# Altium PCB PCB1.PcbDoc
Units mil, origin at the board's own origin, x right, y up, seen from the top; angles counter-clockwise.
Board outline 1025.03 x 1080.03 mil, 2 copper layers (Top Layer, Bottom Layer); 7 components, 6 nets, 20 pads, 0 vias.
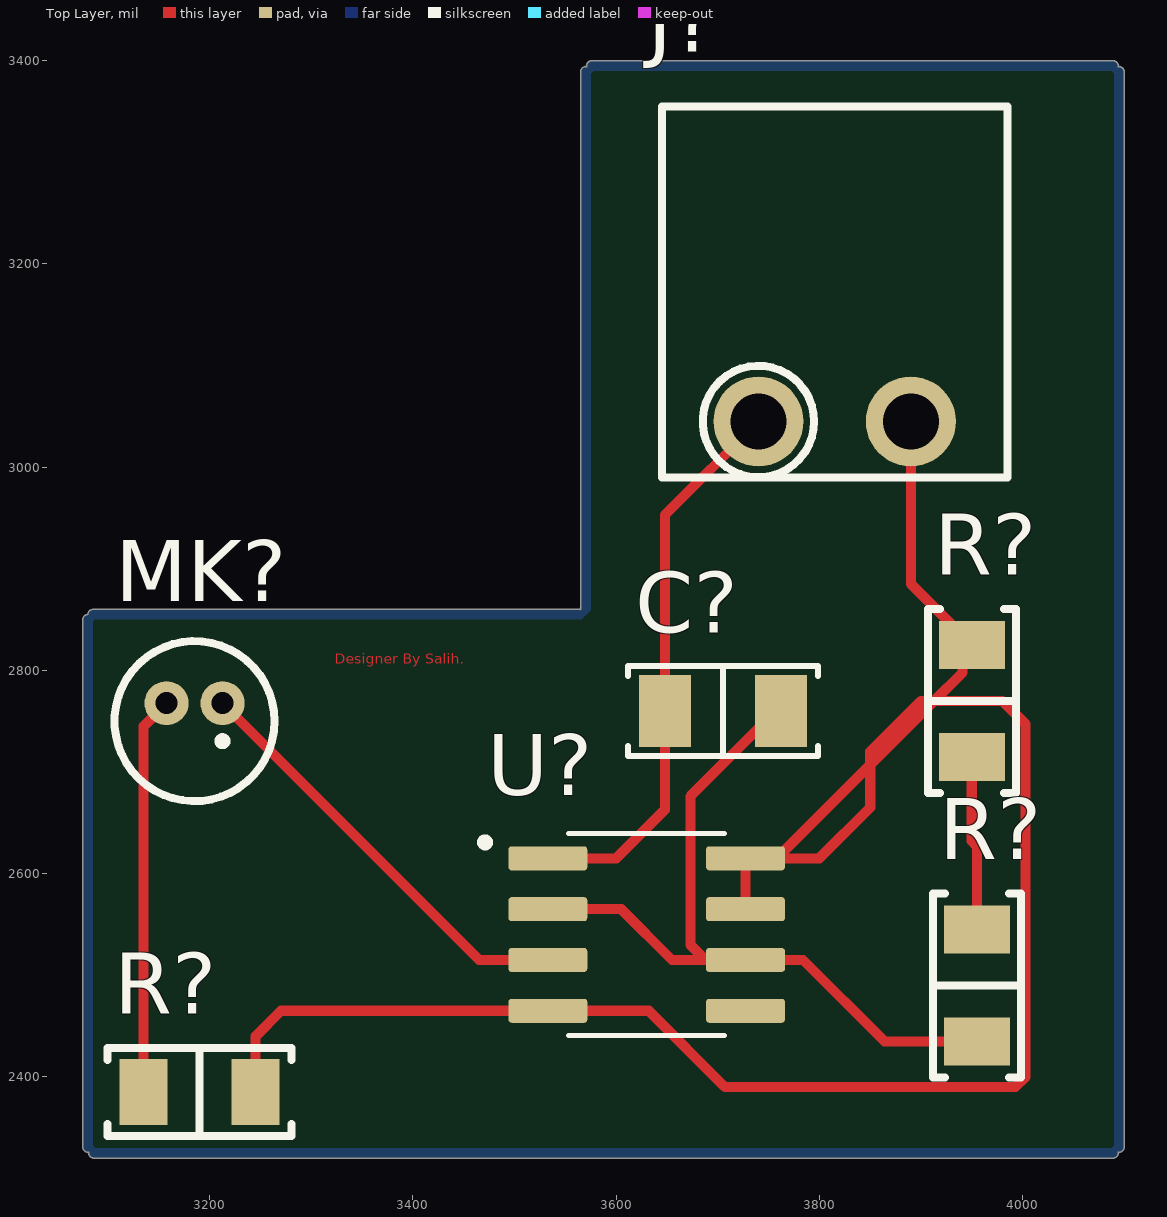
[diagram p0: Top Layer view]
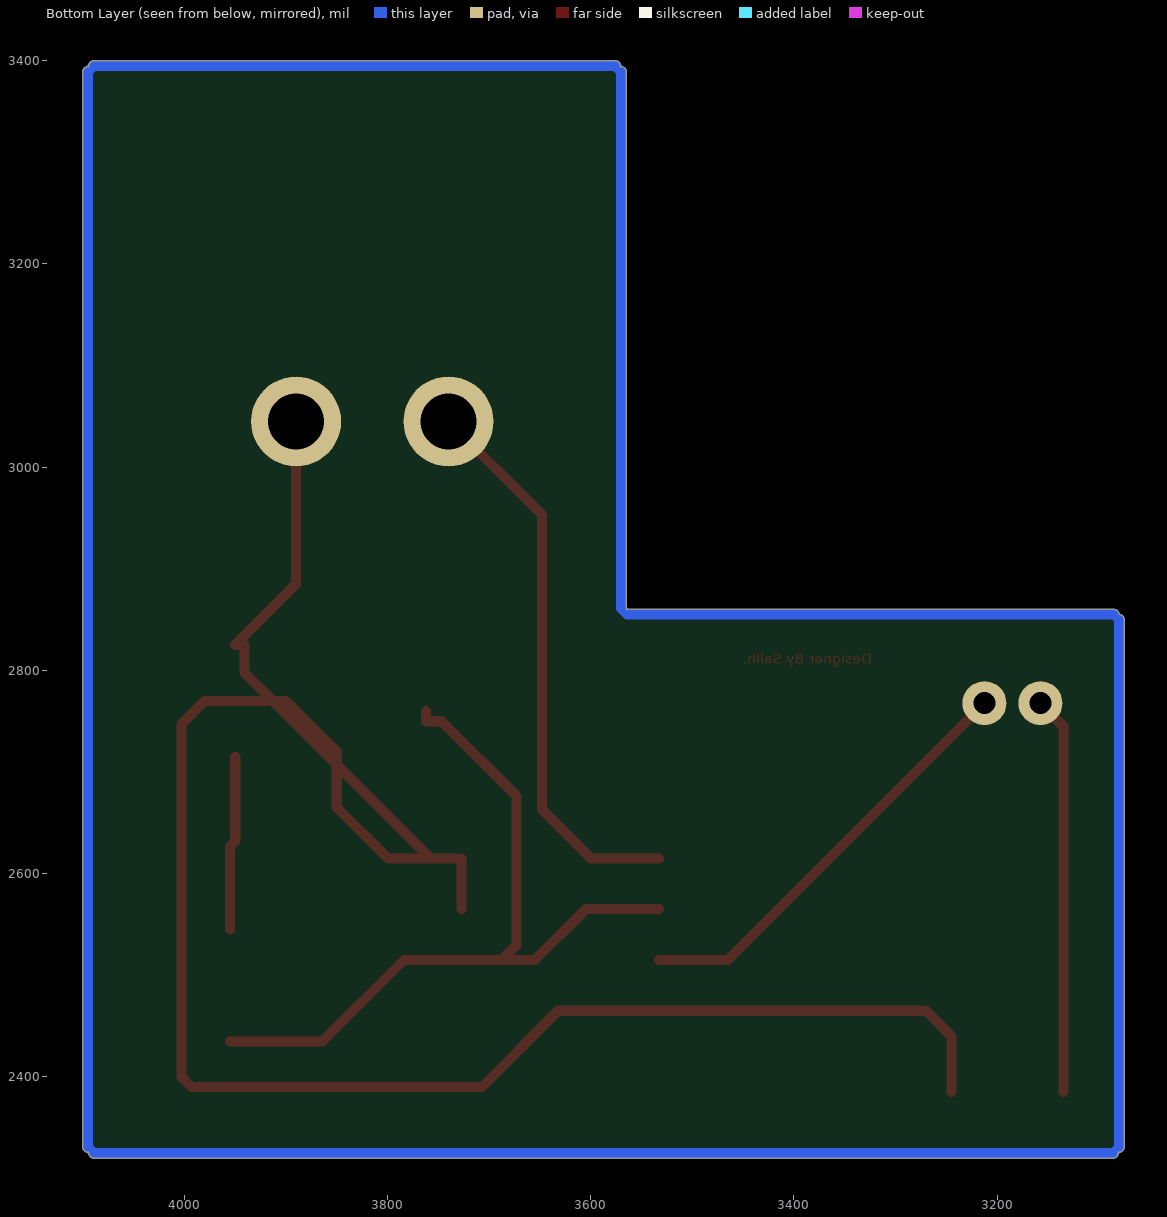
[diagram p1: Bottom Layer view, seen from below]
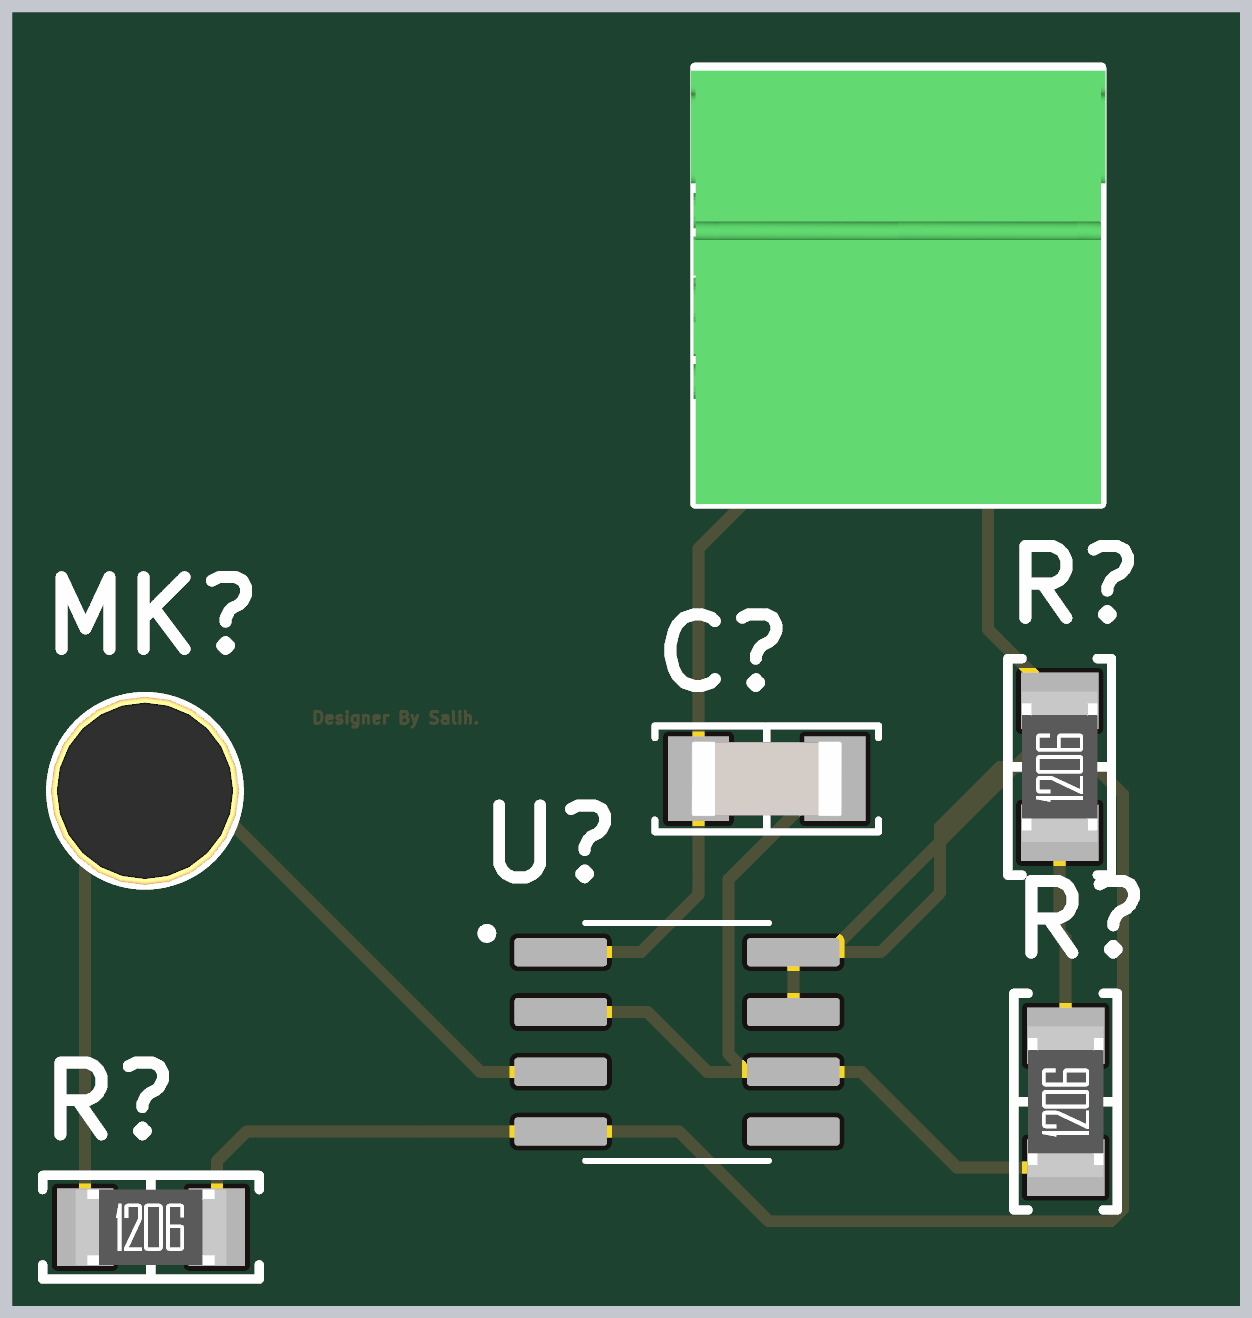
[diagram p2: 3D render of the assembled board from above, using the file's embedded part models]

## Layer stack, top to bottom
Top Solder: solder mask 0.4, Solder Resist, Dk 3.5
Top Layer: signal copper 1.4
Dielectric 1: dielectric 12.6, FR-4, Dk 4.8
Bottom Layer: signal copper 1.4
Bottom Solder: solder mask 0.4, Solder Resist, Dk 3.5

## Board outline
3074.99,2330.86 3074.99,2850 cw(c3080,2850) 3079.99,2855.01 cw(c3085,2855) 3085,2860.01 3564.14,2860.01 cw(c3564.14,2855) 3565.07,2859.93 cw(c3570,2860.86) 3564.99,2860.86 3564.99,3389.14 cw(c3570,3389.14) 3570.93,3394.07 cw(c3575.86,3395) 3575.86,3400.01 4089.14,3400.01 cw(c4089.14,3395) 4094.16,3395 cw(c4089.14,3395) 4094.07,3394.07 cw(c4095,3389.14) 4100.02,3389.14 4100.02,2330.86 cw(c4095,2330.86) 4094.07,2325.93 cw(c4089.14,2325) 4094.16,2325 cw(c4089.14,2325) 4089.14,2319.99 3085.86,2319.99 cw(c3085.86,2325) 3080.93,2325.93 cw(c3080,2330.86)

## Design rules (kind name [scope] priority, off if disabled: settings)
Clearance [All] p1: gap=10 ignorepadtopadclearanceinfootprint=FALSE except(0: Arc-Hole Track-Hole SMDPad-Hole THPad-Hole Via-Hole Fill-Hole Poly-Hole Region-Hole Text-Hole)
PolygonConnect [All] p1: connectstyle=Relief reliefconductorwidth=10 reliefentries=4 polygonreliefangle="90 Angle" airgapwidth=10
RoutingVias [All] p1: holewidth=28 width=50 viastyle="Through Hole" minholewidth=28 minwidth=50 maxholewidth=28 maxwidth=50
SolderMaskExpansion [All] p1: expansion=4 istentingtop=FALSE
Width [All] p1: maxlimit=10 minlimit=10 preferedwidth=10
30 further rules are at their usual default settings.

## Classes and differential pairs
component class Sheet1: C? J? MK? R? U?

## Components (designator, comment, footprint, x,y, rotation, side; value= is the part's Value field where it differs from the comment)
C? "47pF" "CAP 1206_3216 - 0.8MM" 3705,2760 r0 top
J? "OQ0232510000G" "FCI 06-381-2PIN" 3815,3175 r0 top
MK? "CMEJ-0415-42-P" "CUI CMEJ-0415-42-P" 3185,2750 r180 top
R? "22 kOhms" "RES 1206_3216" 3955,2490 r90 top
R? "2 kOhms" "RES 1206_3216" 3950,2770 r90 top
R? "33 Ohms" "RES 1206_3216" 3190,2385 r0 top
U? "LM555CM/NOPB" SOIC127P599X175-8N 3630,2540 r0 top

## Footprints (in the part's own frame and the unit in brackets; to place one, negate y for a bottom-side part, rotate by r counter-clockwise, add the part's x,y. Pads: shape width x height; smd on the part's side, far side on the other; paste and mask are expansions set on the pad)
"CAP 1206_3216 - 0.8MM" [mm] "Chip Capacitor, 2-Leads, Body 3.25x1.60mm, IPC Medium Density"
  rect 1.3x1.8 smd: 1(-1.45,0) 2(1.45,0)
  silkscreen extent -2.38,-1.13 2.38,1.13, body extent -1.6,-0.8 1.6,0.8, height 0.8
"CUI CMEJ-0415-42-P" [mm] "MIC COND ANALOG OMNI -42DB 4MM D"
  round 1.1 hole 0.55 mask+0.102: G(0.7,-0.45) OUT(-0.7,-0.45)
  silkscreen extent -2,-2 2,2, body extent -2,-2 2,2, height 1.83
"FCI 06-381-2PIN" [mm] "FCI Pluggable Terminal Block"
  round 2.25 hole 1.4: 1(-1.905,-3.302) 2(1.905,-3.302)
  silkscreen extent -4.32,-4.7 4.32,4.57, body extent -4.4,-4.7 4.4,4.5, height 7.6
"RES 1206_3216" [mm] "Chip Resistor, 2-Leads, Body 3.13x1.55mm, IPC Medium Density"
  rect 1.2x1.65 smd: 1(-1.4,0) 2(1.4,0)
  silkscreen extent -2.3,-1.1 2.3,1.1, body extent -1.6,-0.8 1.6,0.8, height 0.6
SOIC127P599X175-8N [mm]
  rrect25% 1.97x0.6 smd: 1(-2.47,1.905) 2(-2.47,0.635) 3(-2.47,-0.635) 4(-2.47,-1.905) 5(2.47,-1.905) 6(2.47,-0.635) 7/7(2.47,0.635) 8(2.47,1.905)
  silkscreen extent -4.14,-2.53 1.95,2.53

## Part data
C?: library part AC1206JRNPOBBN470, "CAP CER 47PF 500V NPO 1206", Device Package="1206 (3216 Metric)", Manufacturer=Yageo, Operating Temperature="-55°C ~ 125°C", Ratings=AEC-Q200, Supplier Part Number 1=311-3213-1-ND, Temperature Coefficient="C0G, NP0", Tolerance=±5%, Voltage - Rated=500V, Applications=Automotive, Capacitance=47pF, ComponentLink1Description=Datasheet, ComponentLink1URL=http://www.yageo.com/NewPortal/_en/search/productDocs.jsp?YageoPartNumber=AC1206JRNPOBBN470, ComponentLink2Description="DigiKey Link", ComponentLink2URL=http://digikey.com/product-detail/en/yageo/AC1206JRNPOBBN470/311-3213-1-ND/6643465, LastUpdated="2.09.2020 01:04:46", Lifecycle Status=Active, Minimum Order=1, Mounting Type="Surface Mount, MLCC", Package / Case="1206 (3216 Metric)", Packaging=TapeAndReel, Part Number=AC1206JRNPOBBN470, Part Status=Active, PartId=18705, Price=0.10, Series=AC, Size / Dimension="0.126\" L x 0.063\" W (3.20mm x 1.60mm)", Supplier 1=DigiKey, Thickness (Max)="0.028\" (0.70mm)"
J?: "TERM BLOCK HDR 2POS 90DEG 3.81MM", Color=Green, Current - UL=10A, Manufacturer="Amphenol Anytek", Operating Temperature="-40°C ~ 115°C", Supplier Part Number 1=609-3819-ND, Voltage - UL=300V, ComponentLink1Description=Datasheet, ComponentLink1URL=http://portal.fciconnect.com/Comergent//fci/drawing/oqxx32x100j0g.pdf, ComponentLink2Description="DigiKey Link", ComponentLink2URL=//digikey.com/product-detail/en/amphenol-anytek/OQ0232510000G/609-3819-ND/2261255, Contact Mating Finish=Tin, Header Orientation="90°, Right Angle", LastUpdated="16.12.2019 19:14:30", Lifecycle Status=0, Minimum Order=1, Mounting Type="Through Hole", Number of Levels=1, Number of Positions=2, Packaging=Bulk, Part Number=OQ0232510000G, Part Status=Active, Pitch="0.150\" (3.81mm)", Positions Per Level=2, Price=0.49, Series=06-381, Supplier 1=DigiKey, Termination Style=Solder, Type="Header, Male Pins, Shrouded (4 Side)"
MK?: "MICROPHONE, 4 MM, ELECTRET CONDE", Current - Supply=500µA, Frequency Range="100Hz ~ 10kHz", Manufacturer="CUI Devices", Supplier Part Number 1=102-6542-ND, Voltage - Rated=2V, ComponentLink1Description=Datasheet, ComponentLink1URL=https://www.cuidevices.com/product/resource/digikeypdf/cmej-0415-42-p.pdf, ComponentLink2Description="DigiKey Link", ComponentLink2URL=http://digikey.com/product-detail/en/cui-devices/CMEJ-0415-42-P/102-6542-ND/10253451, Direction=Omnidirectional, Height (Max)="0.067\" (1.70mm)", LastUpdated="24.04.2020 00:49:53", Lifecycle Status=Active, Minimum Order=1, Output Type=Analog, Packaging=Tray, Part Number=CMEJ-0415-42-P, Part Status=Active, Port Location=Top, Price=0.40, S/N Ratio=60dB, Sensitivity="-42dB ±3dB @ 94dB SPL", Series=CMEJ, Shape=Circular, Size / Dimension="0.157\" Dia (4.00mm)", Supplier 1=DigiKey, Termination="PC Pins", Type="Electret Condenser"
R?: library part RT1206BRD0722KL, "RES SMD 22K OHM 0.1% 1/4W 1206", Device Package="1206 (3216 Metric)", Manufacturer=Yageo, Operating Temperature="-55°C ~ 155°C", Power (Watts)="0.25W, 1/4W", Supplier Device Package=1206, Supplier Part Number 1=YAG2027CT-ND, Temperature Coefficient=±25ppm/°C, Tolerance=±0.1%, ComponentLink1Description=Datasheet, ComponentLink1URL=https://www.yageo.com/upload/media/product/productsearch/datasheet/rchip/PYu-RT_1-to-0.01_RoHS_L_11.pdf, ComponentLink2Description="DigiKey Link", ComponentLink2URL=http://digikey.com/product-detail/en/yageo/RT1206BRD0722KL/YAG2027CT-ND/5139475, Composition="Thin Film", Height - Seated (Max)="0.026\" (0.65mm)", LastUpdated="2.09.2020 01:13:11", Lifecycle Status=Active, Minimum Order=1, Number of Terminations=2, Package / Case="1206 (3216 Metric)", Packaging=TapeAndReel, Part Number=RT1206BRD0722KL, Part Status=Active, PartId=26867, Price=0.10, Resistance="22 kOhms", Series=RT, Size / Dimension="0.122\" L x 0.063\" W (3.10mm x 1.60mm)", Supplier 1=DigiKey
R?: library part PTN1206E2001BST1, "RES 2K OHM 0.1% 2/5W 1206", Device Package="1206 (3216 Metric)", Manufacturer="Vishay Thin Film", Operating Temperature="-55°C ~ 155°C", Power (Watts)="0.4W, 2/5W", Supplier Device Package=1206, Supplier Part Number 1=764-1290-1-ND, Temperature Coefficient=±25ppm/°C, Tolerance=±0.1%, ComponentLink1Description=Datasheet, ComponentLink1URL=http://www.vishay.com/docs/60026/ptn.pdf, ComponentLink2Description="DigiKey Link", ComponentLink2URL=http://digikey.com/product-detail/en/vishay-thin-film/PTN1206E2001BST1/764-1290-1-ND/7103074, Composition="Thin Film", Features="Anti-Sulfur, Moisture Resistant, Non-Inductive", Height - Seated (Max)="0.033\" (0.84mm)", LastUpdated="2.09.2020 01:13:11", Lifecycle Status=Active, Minimum Order=1, Number of Terminations=2, Package / Case="1206 (3216 Metric)", Packaging=TapeAndReel, Part Number=PTN1206E2001BST1, Part Status=Active, PartId=26935, Price=0.27, Resistance="2 kOhms", Series=PTN, Size / Dimension="0.126\" L x 0.063\" W (3.20mm x 1.60mm)", Supplier 1=DigiKey
R?: library part AC1206JR-0733RL, "RES SMD 33 OHM 5% 1/4W 1206", Device Package="1206 (3216 Metric)", Manufacturer=Yageo, Operating Temperature="-55°C ~ 155°C", Power (Watts)="0.25W, 1/4W", Ratings=AEC-Q200, Supplier Device Package=1206, Supplier Part Number 1=YAG3955CT-ND, Temperature Coefficient=±100ppm/°C, Tolerance=±5%, ComponentLink1Description=Datasheet, ComponentLink1URL=https://www.yageo.com/upload/media/product/productsearch/datasheet/rchip/PYu-AC_51_RoHS_L_7.pdf, ComponentLink2Description="DigiKey Link", ComponentLink2URL=http://digikey.com/product-detail/en/yageo/AC1206JR-0733RL/YAG3955CT-ND/6006804, Composition="Thick Film", Features="Automotive AEC-Q200, Moisture Resistant", Height - Seated (Max)="0.026\" (0.65mm)", LastUpdated="2.09.2020 01:13:10", Lifecycle Status=Active, Minimum Order=1, Number of Terminations=2, Package / Case="1206 (3216 Metric)", Packaging=TapeAndReel, Part Number=AC1206JR-0733RL, Part Status=Active, PartId=27117, Price=0.01, Resistance="33 Ohms", Series=AC, Size / Dimension="0.122\" L x 0.063\" W (3.10mm x 1.60mm)", Supplier 1=DigiKey
U?: "Highly Stable 555 Timer 8-SOIC 0 to 70", Package="SOIC-8 Texas Instruments", Arrow_Asia-Purchase-URL=https://snapeda.com/shop?store=Arrow+Asia&id=50124, Availability=Good, Check_prices=https://www.snapeda.com/parts/LM555CM/NOPB/Texas%20Instruments/view-part/50124/?ref=eda, DigiKey-Purchase-URL=https://snapeda.com/shop?store=DigiKey&id=50124, MF="Texas Instruments", Mouser-Purchase-URL=https://snapeda.com/shop?store=Mouser&id=50124, MP=LM555CM/NOPB, Price=None, SnapEDA_Link=https://www.snapeda.com/parts/LM555CM/NOPB/Texas%20Instruments/view-part/50124/?ref=snap, Texas_Instruments-Purchase-URL=https://snapeda.com/shop?store=Texas+Instruments&id=50124

## Nets (pads, with @x,y where several pads share a name; then routed paths per layer and width w, separated by ;. In a path a pad name is that pad's centre, name@x,y a point inside that pad or via, vN(x,y) a via of type N, cw(c..) or ccw(c..) an arc to the next point about the centre after c; other vN are vias at no path point)
GND: C?.1 J?.1 U?.1 | length 555.2
  Top Layer w10: U?.1 3600,2615 3647.91,2662.91 C?.1 3647.91,2952.91 J?.1
NetC?_2: C?.2 R?.1@3955,2434.88 U?.2 U?.6 | length 773.1
  Top Layer w10: U?.2 3605,2565 3655,2515 3688,2515 ; C?.2 3762.09,2750 3747,2750 3673,2676 3673,2530 3688,2515 ; R?.1@3955,2434.88 3864,2434.88 3783.88,2515 U?.6 3688,2515
NetJ?_2: J?.2 R?.2@3245.12,2385 R?.2@3950,2825.12 U?.4 U?.7/7 U?.8 | length 2176.8
  Top Layer w10: R?.2@3245.12,2385 3245.12,2440 3270.12,2465 U?.4 3632,2465 3707,2390 3993,2390 4003,2400 4003,2747 3980,2770 3913,2770 ; U?.7/7 U?.8 U?.8@3758,2615 ; J?.2 3890,2885.12 3950,2825.12 3941,2825.12 3941,2798 3913,2770 ; U?.8@3758,2615 3850,2707 ; U?.8@3758,2615 3800,2615 3850,2665 3850,2707 ; 3850,2707 3850,2720 3900,2770 3913,2770 ; 3850,2707 3913,2770
NetMK?_G: MK?.G R?.1@3134.88,2385 | length 392.1
  Top Layer w10: R?.1@3134.88,2385 3134.88,2745.16 MK?.G
NetMK?_OUT: MK?.OUT U?.3 | length 424.9
  Top Layer w10: MK?.OUT 3465.28,2515 U?.3
NetR?_1: R?.1@3950,2714.88 R?.2@3955,2545.12 | length 171.8
  Top Layer w10: R?.1@3950,2714.88 3950,2632 3955,2627 R?.2@3955,2545.12
pads on no net: U?.5
copper on no net: | length 4149.9
  Bottom Layer w10: 3080,2330.86 3080,2850 3085,2855 3564.14,2855 3570,2860.86 3570,3389.14 3575.86,3395 4089.14,3395 4095,3389.14 4095,2330.86 4089.14,2325 3085.86,2325 3080,2330.86

## Other copper
Top Layer:
  text "Designer By Salih." at 3323,2806.33 h10